# EAGLE board Data Logger (EAGLE 6.4)
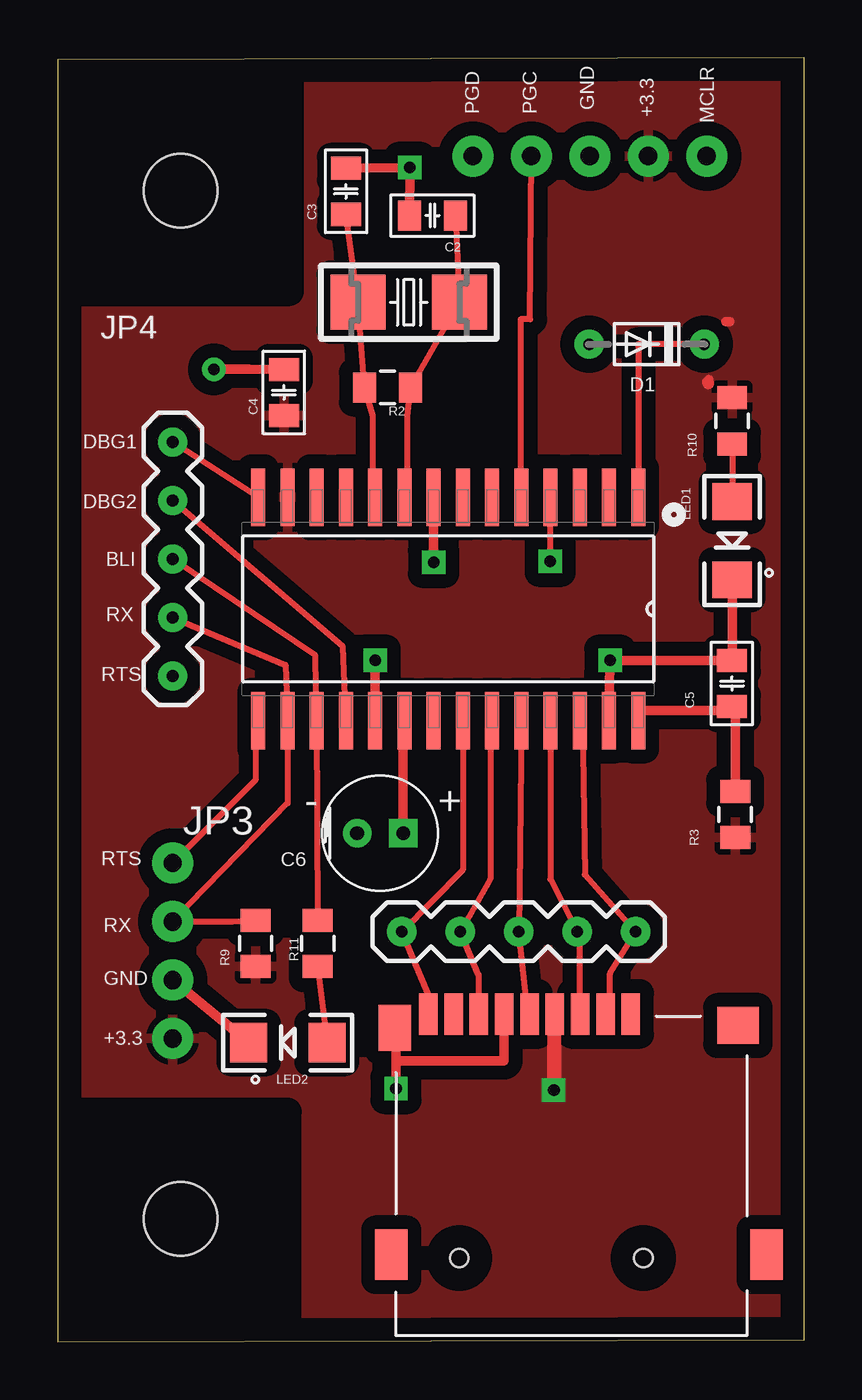
[diagram p0: board, top side]
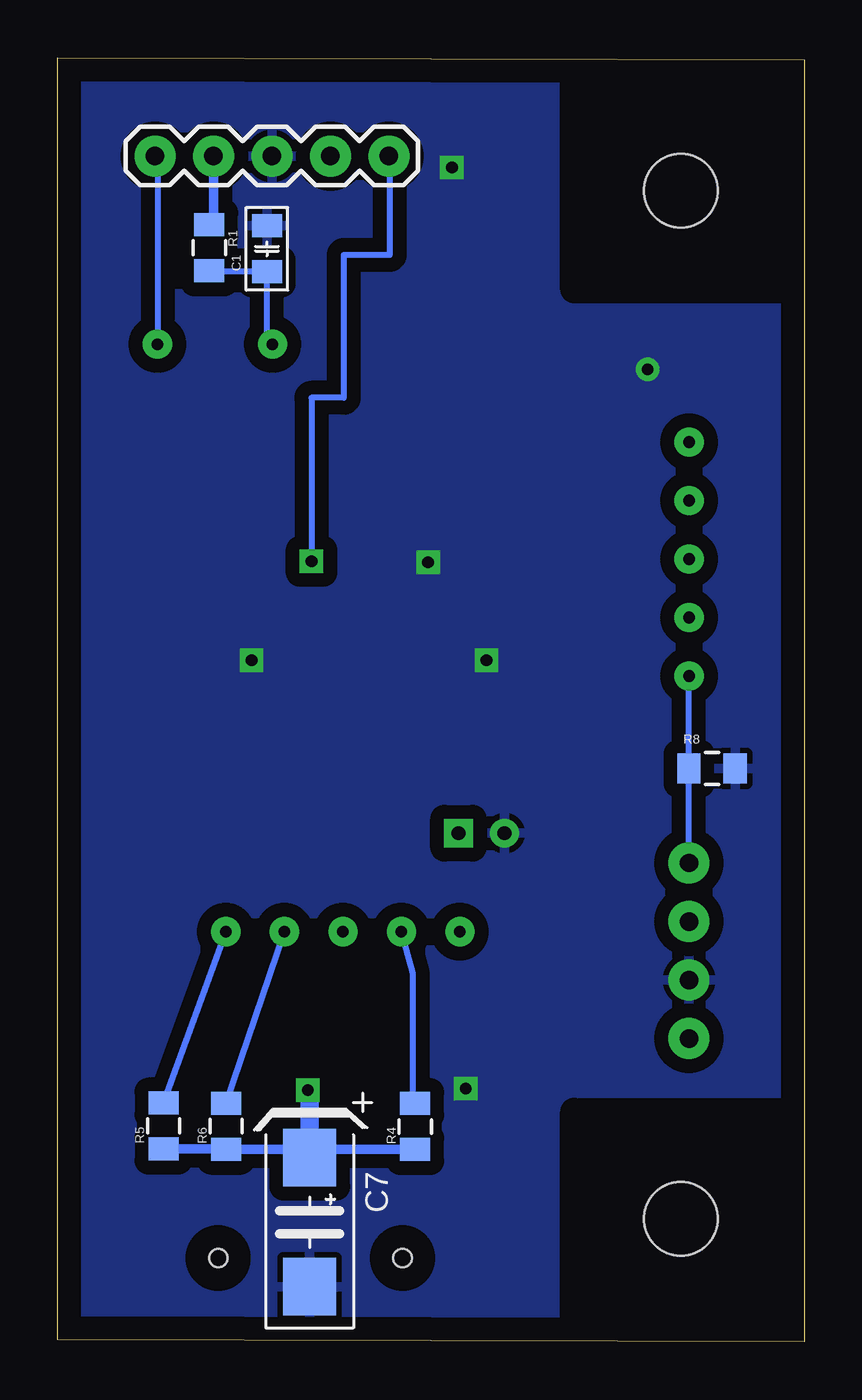
[diagram p1: board, bottom side, seen from below]

Size 32.43 x 55.78 mm. Coordinates in mm from the lower left corner, seen from the top.
Outline: 0,0 32.43,0.1 32.43,55.78 0,55.68 0,0
Copper layers (1*16): Top 0.035mm / dielectric 1.5mm / Bottom 0.035mm
Design rules "AZCustom": minimum track width 10mil, minimum drill 16mil, track to track 10mil, track to pad 10mil, pad to pad 12mil, via to via 10mil, smd to smd 8mil, copper to edge 40mil, drill to drill 20mil, minimum pad ring 12mil, minimum via ring 10mil, stop-mask expansion 4mil, vias tented up to drill 25mil, thermal gap 10mil
Net classes: 0 default: width 0.203 mm, clearance 0.203 mm; 2 PWR: width 0.406 mm, clearance 0.406 mm
Holes 3.2 mm at 5.35,5.35 5.35,50
tRestrict: area 0,0 to 10,10; area 0.1,45.6 to 10.1,55.6
bRestrict: area 0,0 to 10,10; area 0,45.7 to 10,55.7

## Footprints (pad centres in the part's own frame; a part is rotated, then mirrored left to right if it is on the bottom)
0805_INCH-HS-CAP = smd 1 x 1.3: 1 -1,0; 2 1,0
CAP-ELE-5MM = drill 0.6 pad 1.25 square: + 2,0 | drill 0.6 pad 1.25: - 0,0
TANT-C-6032 = smd 2.5 x 2.3: + -2.8,0; - 2.8,0
DO34-5 = drill 0.5 pad 1.27: A 2.5,0; C -2.5,0
1X05-PRECISE = drill 0.8 pad 1.778: 1 0,0; 2 2.54,0; 3 5.08,0; 4 7.62,0; 5 10.16,0
1X05_MACHINED = drill 0.508 pad 1.27: 1 -5.08,0; 2 -2.54,0; 3 0,0; 4 2.54,0; 5 5.08,0
1X04-PRECISE-NO-SILK = drill 0.8 pad 1.778: 1 -3.8,0; 2 -1.26,0; 3 1.28,0; 4 3.82,0
1206_INCH-HS-LED = smd 1.6 x 1.7: A -1.7,0; C 1.7,0
CRYSTAL-SMD-5.0X3.2 = smd 2.4 x 2.4: P$1 -2.2,0; P$2 2.2,0
0805_INCH-HS = smd 1 x 1.3: 1 -1,0; 2 1,0
SOIC28-W_MC = smd 2.5 x 0.6: 1 -4.85,8.255; 2 -4.85,6.985; 3 -4.85,5.715; 4 -4.85,4.445; 5 -4.85,3.175; 6 -4.85,1.905; 7 -4.85,0.635; 8 -4.85,-0.635; 9 -4.85,-1.905; 10 -4.85,-3.175; 11 -4.85,-4.445; 12 -4.85,-5.715; 13 -4.85,-6.985; 14 -4.85,-8.255; 15 4.85,-8.255; 16 4.85,-6.985; 17 4.85,-5.715; 18 4.85,-4.445; 19 4.85,-3.175; 20 4.85,-1.905; 21 4.85,-0.635; 22 4.85,0.635; 23 4.85,1.905; 24 4.85,3.175; 25 4.85,4.445; 26 4.85,5.715; 27 4.85,6.985; 28 4.85,8.255
MICROSD_V1 = smd 1.8 x 0.8: 1 -6.35,2.58; 2 -6.35,1.48; 3 -6.35,0.38; 4 -6.35,-0.72; 5 -6.35,-1.82; 6 -6.35,-2.92; 7 -6.35,-4.02; 8 -6.35,-5.12; CD -6.35,-6.22 | smd 2.2 x 1.4: FRAME@1 4.1,8.48; FRAME@2 4.1,-7.82 | smd 2 x 1.4: FRAME@3 -5.75,-7.67 | smd 1.6 x 1.8: FRAME@4 -5.85,7.23 | hole 0.8: 4.25,3.13; 4.25,-4.87

## Placement (x,y rotation side)
C1  47nF  [0805_INCH-HS-CAP]  23.33,47.47 90 bottom
C2  22pF  [0805_INCH-HS-CAP]  16.28,48.92 0 top
C3  22pF  [0805_INCH-HS-CAP]  12.52,49.97 270 top
C4  0.1uF  [0805_INCH-HS-CAP]  9.83,41.23 90 top
C5  0.1 uF  [0805_INCH-HS-CAP]  29.29,28.59 90 top
C6  10uF  [CAP-ELE-5MM]  13.02,22.09 0 top
C7  22 uF  [TANT-C-6032]  21.48,5.2 270 bottom
D1  DIODE_TTH  [DO34-5]  25.59,43.33 180 top
JP1  ICSP  [1X05-PRECISE]  28.2,51.5 0 bottom
JP2  HEADER-05_MACHINED  [1X05_MACHINED]  20.03,17.81 180 top
JP3  HEADER-04_PRECISE-NO-SILK  [1X04-PRECISE-NO-SILK]  5,17 270 top
JP4  DEBUG  [1X05_MACHINED]  5,34 90 top
LED1  Green  [1206_INCH-HS-LED]  29.3,34.8 270 top
LED2  Orange  [1206_INCH-HS-LED]  10,13 180 top
Q1  12MHz  [CRYSTAL-SMD-5.0X3.2]  15.26,45.15 0 top
R1  4.7K  [0805_INCH-HS]  25.84,47.52 270 bottom
R2  1M  [0805_INCH-HS]  14.33,41.45 180 top
R3  10 Ohm  [0805_INCH-HS]  29.43,22.91 270 top
R4  47K  [0805_INCH-HS]  16.9,9.36 90 bottom
R5  47K  [0805_INCH-HS]  27.83,9.38 90 bottom
R6  47K  [0805_INCH-HS]  25.11,9.37 90 bottom
R8  40K  [0805_INCH-HS]  4,24.9 180 bottom
R9  40K  [0805_INCH-HS]  8.6,17.3 90 top
R10  150  [0805_INCH-HS]  29.3,40 90 top
R11  330  [0805_INCH-HS]  11.3,17.3 90 top
U$1  PIC24HJ128GP202  [SOIC28-W_MC]  16.97,31.83 270 top
U$2  MICROSD  [MICROSD_V1]  22.32,7.89 270 top

## Library data of the parts
C1-C7 D1 JP1-JP4 LED1 LED2 Q1 R1-R6 R8-R11 U$1 U$2 = AZ Custom

## Nets
3.3V [PWR]: C4.1 C7.+ JP1.2 JP3.4 R1.1 R3.2 R4.1 R5.1 R6.1 R9.1 R10.2 U$1.13 U$2.4
BLI: JP4.3 R11.2 U$1.17
CLK: JP2.3 U$1.24 U$2.5
CS: JP2.1 R5.2 U$1.26 U$2.2
DBG1: JP4.5 U$1.14
DBG2: JP4.4 U$1.18
GND [PWR]: C1.2 C2.1 C3.1 C4.2 C5.2 C6.- C7.- JP1.3 JP3.3 LED1.C LED2.C R8.1 U$1.8 U$1.19 U$1.27 U$2.6 U$2.FRAME@1 U$2.FRAME@2 U$2.FRAME@3 U$2.FRAME@4
MCLR: D1.C JP1.1 U$1.1
N$1: C1.1 D1.A R1.2
N$2: C5.1 R3.1 U$1.28
N$3: LED1.A R10.1
N$4: LED2.A R11.1
OSCI: C2.2 Q1.P$2 R2.1 U$1.9
OSCO: C3.2 Q1.P$1 R2.2 U$1.10
PGC: JP1.4 U$1.5
PGD: JP1.5 U$1.4
RTS: JP3.1 JP4.1 R8.2 U$1.15
RX: JP3.2 JP4.2 R9.2 U$1.16
SDI: JP2.4 R4.2 U$1.23 U$2.7
SDO: JP2.2 R6.2 U$1.25 U$2.3
SENSE: JP2.5 U$1.22 U$2.CD
VCAP: C6.+ U$1.20

## Tracks (layer width: path | path; a pad name or v marks a point on that pad's centre or on a via)
3.3V  (via drill 0.51)
  Top 0.406: U$2.4 21.56,14.24 | 28.3,41.8 28.3,41.59 | 28.2,41.7 28.25,41.57 | 29.2,44.3 29.03,44.3
  Top 0.61: 21.56,14.24 v21.56,10.94
  Bottom 0.406: v21.56,10.94 21.48,10.94 | R1.1 25.64,48.52 JP1.2 | R4.1 21.48,8.36 C7.+ 21.48,8.37 R6.1 25.11,8.38 R5.1
  Bottom 0.813: 21.48,10.94 C7.+
  pour Top (isolate 0.61): 1.27,0 0,0 0,55.88 31.75,55.88 31.75,0
BLI
  Top 0.254: JP4.3 11.2,29.8 U$1.17 R11.2
CLK
  Top 0.254: U$2.5 20.5,14.3 20.4,14.4 JP2.3 | 20.1,17.8 JP2.3 | U$1.24 JP2.3
CS
  Top 0.254: U$1.26 22.8,26.98 22.9,20.3 JP2.1 24,16 24,14.24 U$2.2
  Bottom 0.254: 27.8,10.38 R5.2 JP2.1
DBG1
  Top 0.254: U$1.14 JP4.5
DBG2
  Top 0.254: U$1.18 12.4,30.2 JP4.4
GND  (via drill 0.51)
  Top 0.406: 16.31,36.7 U$1.8 v16.34,33.86 | U$1.19 v13.8,29.6 | U$1.27 v24,29.6 C5.2 | v6.8,42.24 8.32,42.24 C4.2 | U$2.6 19.4,12.2 14.7,12.2 | 14.7,12.2 v14.7,11 | U$2.FRAME@3 14.7,13.64 14.7,12.2 | LED1.C C5.2 | C3.1 v15.3,51 C2.1 | C5.2 | JP3.3 LED2.C
  Bottom 0.406: v16.34,33.86 16.36,33.86 16.36,33.79 | v14.7,11 14.7,10.9
  pour Bottom (isolate 0.61): 0,0 0,55.88 31.75,55.88 31.75,0
MCLR
  Top 0.254: 25.4,36.58 U$1.1 25.23,43.3 25.2,43.3 25.2,43.33 D1.C
  Bottom 0.254: JP1.1 28.09,51.3 D1.C
N$1
  Bottom 0.254: R1.2 26.34,46.47 C1.1 23.34,43.33 D1.A
N$2
  Top 0.254: 25.4,27.43 U$1.28 | 29.43,27.43 C5.1
  Top 0.406: 25.4,27.43 29.43,27.43 R3.1
N$3
  Top 0.254: R10.1 LED1.A
N$4
  Top 0.254: R11.1 LED2.A
OSCI
  Top 0.254: 16.76,44.2 Q1.P$2 | 15.24,37.08 U$1.9 15.2,37.2 15.2,40.2 R2.1 Q1.P$2 | 16.46,44.4 Q1.P$2 | C2.2 Q1.P$2
OSCO
  Top 0.254: 12.19,44.2 Q1.P$1 | U$1.10 13.7,36.7 13.7,40.2 R2.2 Q1.P$1 | 12.2,44.1 Q1.P$1 | Q1.P$1 C3.2
PGC
  Top 0.254: U$1.5 20.12,37.18 20.11,37.59 20.11,44.41 20.52,44.41 JP1.4
PGD  (via drill 0.51)
  Top 0.254: 21.24,37.08 U$1.4 v21.4,33.9
  Bottom 0.254: 17.78,51.31 JP1.5 18,51.2 18,47.2 20,47.2 20,41 21.4,41 v21.4,33.9
RTS
  Top 0.254: 4.8,20.8 JP3.1 8.6,24.4 8.6,26.98 U$1.15
  Bottom 0.254: JP3.1 R8.2 JP4.1
RX
  Top 0.254: R9.2 7.6,18.26 JP3.2 10,23.4 U$1.16 9.9,29.4 JP4.2
SDI
  Top 0.254: U$2.7 18.29,14.73 18.29,15.95 JP2.4 18.8,20.1 18.8,26.92 U$1.23
  Bottom 0.254: R4.2 17,10.36 17,16 JP2.4
SDO
  Top 0.254: 22.35,18.29 JP2.2 | U$2.3 22.66,14.73 22.66,17.78 22.57,17.78 JP2.2 | U$1.25 21.34,26.92 21.34,25.91 21.4,25.91 21.4,20.1 JP2.2
  Bottom 0.254: R6.2 JP2.2
SENSE
  Top 0.254: U$2.CD 16.26,14.73 JP2.5 17.6,20.5 U$1.22
VCAP
  Top 0.254: 15,26 U$1.20
  Top 0.406: C6.+ 15,26

## Text on the board
tPlace: PGD | PGC | MCLR | GND | +3.3 | DBG1 | DBG2 | BLI | RX | RTS | RTS | RX | GND | +3.3